# Altium PCB koosh_main_board_v1_2.PcbDoc
Units mil, origin at the board's own origin, x right, y up, seen from the top; angles counter-clockwise.
Board outline 600 x 600 mil, 4 copper layers (Top Layer, PWR, GND, Bottom Layer), stack 23.778 mil thick; 43 components, 48 nets, 176 pads, 73 vias.
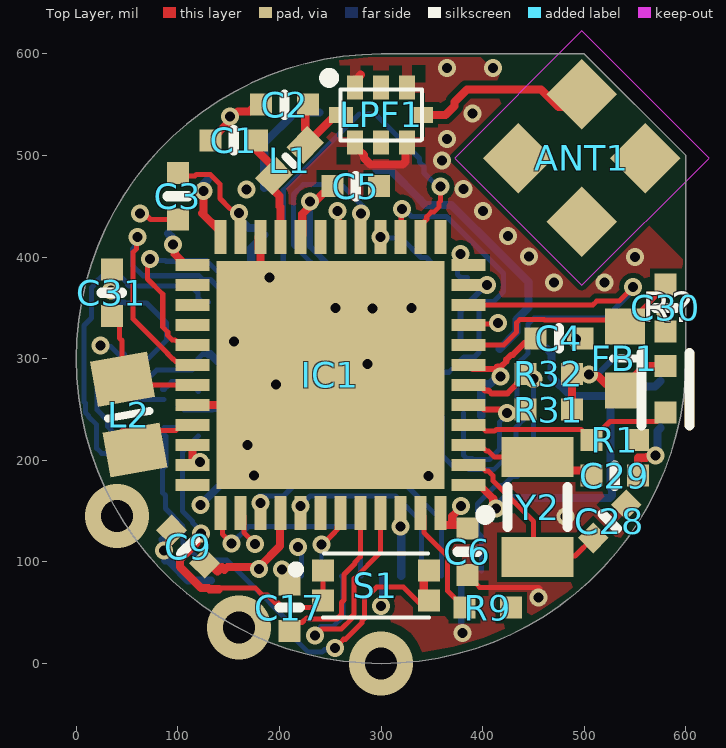
[diagram p0: Top Layer view]
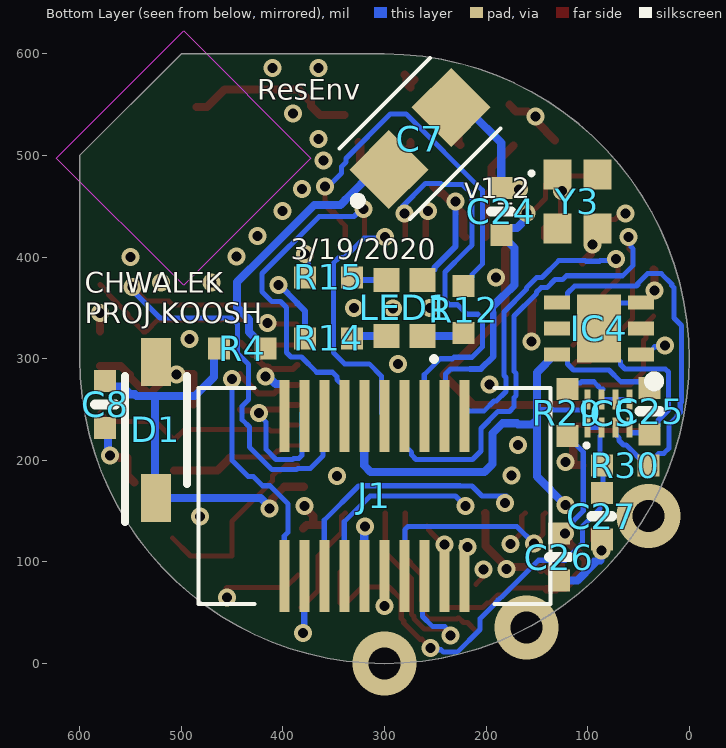
[diagram p1: Bottom Layer view, seen from below]
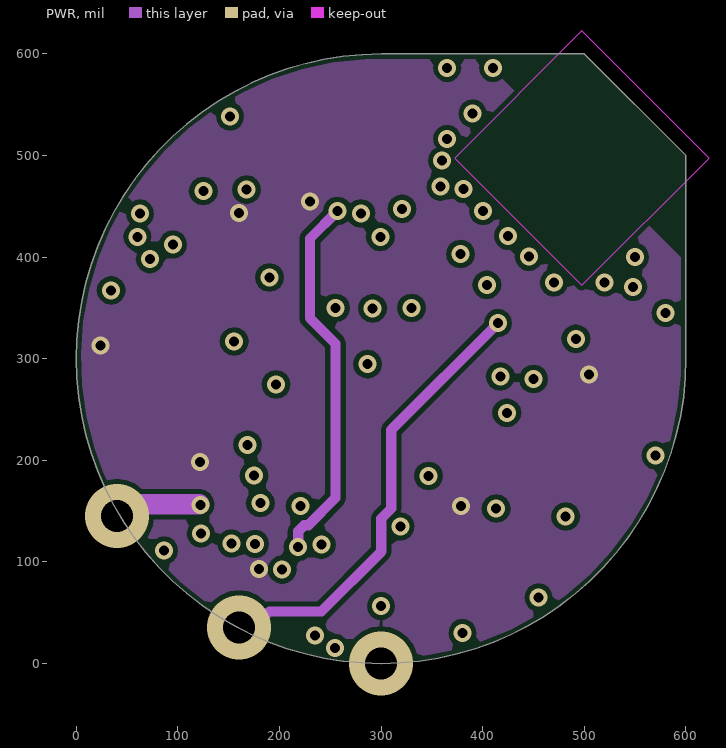
[diagram p2: PWR]
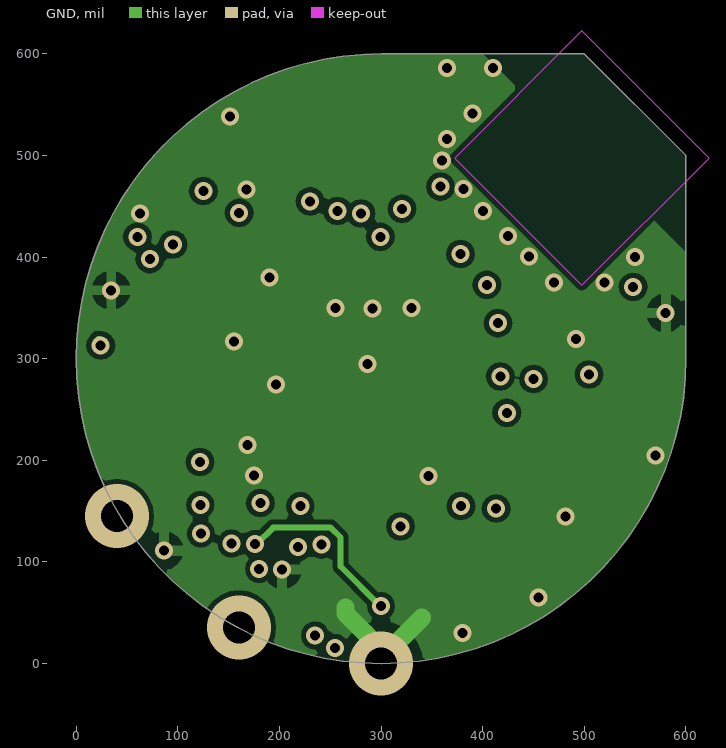
[diagram p3: GND]
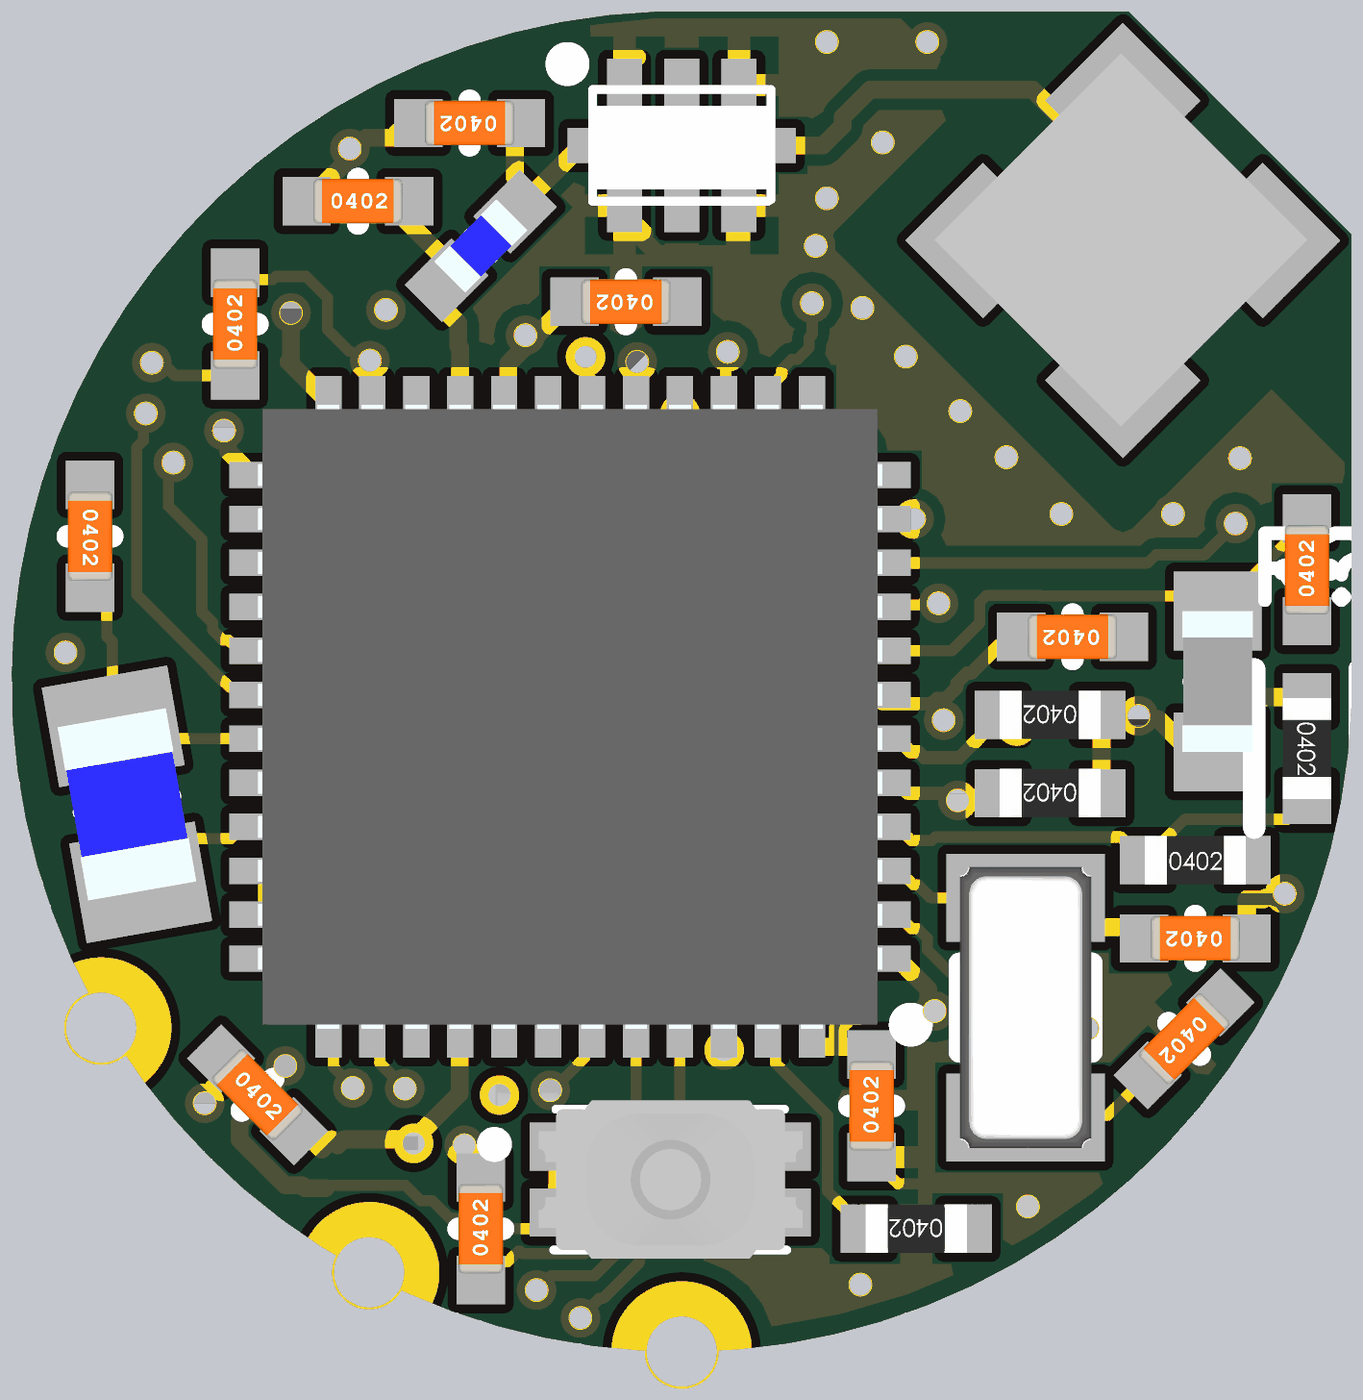
[diagram p4: 3D render of the assembled board from above, using the file's embedded part models]
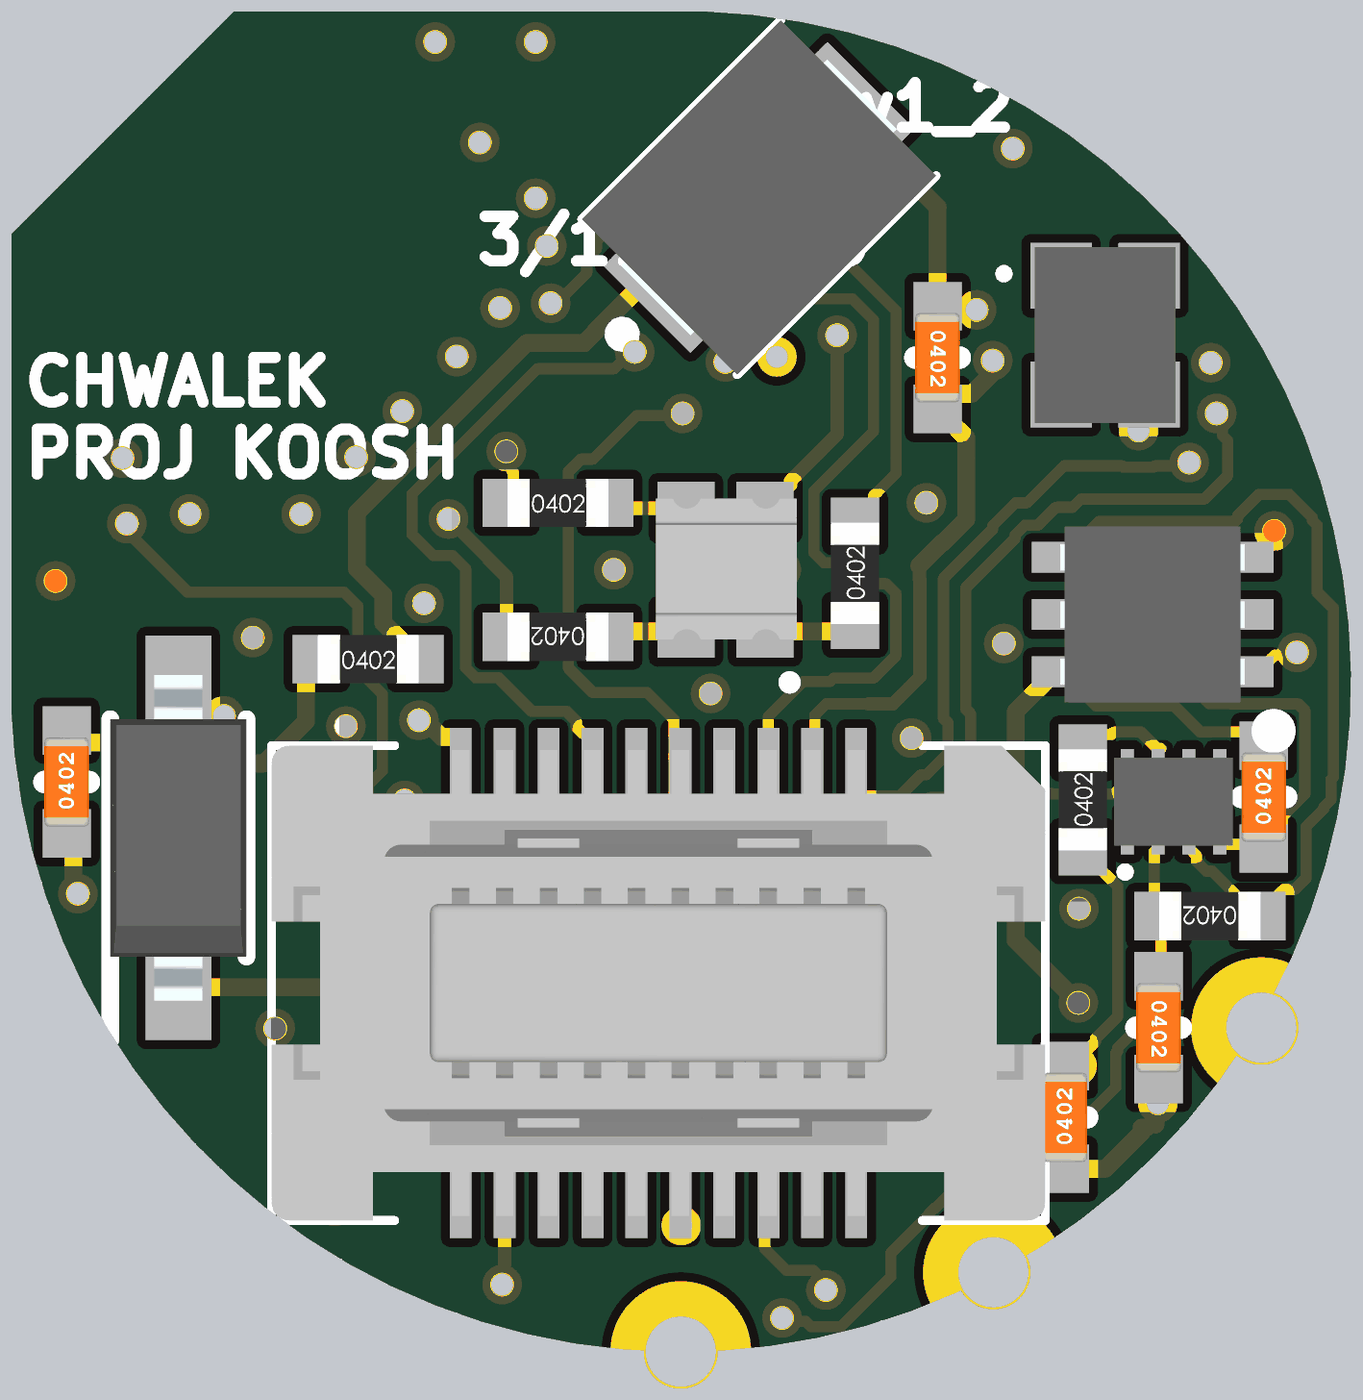
[diagram p5: 3D render of the assembled board from below, using the file's embedded part models]

## Layer stack, top to bottom
Top Solder: solder mask 0.394, Solder Resist, Dk 3.5
Top Layer: signal copper 1.417
Dielectric 2: prepreg 2.795, PP-006, Dk 4.1
PWR: signal copper 1.378
Dielectric 1: dielectric 12.598, FR-4, Dk 4.8
GND: signal copper 1.378
Dielectric 3: prepreg 2.795, PP-006, Dk 4.1
Bottom Layer: signal copper 1.417
Bottom Solder: solder mask 0.394, Solder Resist, Dk 3.5

## Board outline
600,300 cw(c300,300) 300,600 500,600 600,500

## Design rules (kind name [scope] priority, off if disabled: settings)
Clearance [All] p1: gap=5 ignorepadtopadclearanceinfootprint=FALSE except(0: Arc-Hole Track-Hole SMDPad-Hole THPad-Hole Via-Hole Fill-Hole Poly-Hole Region-Hole Text-Hole)
PlaneConnect PWR [InNet('GND') or InNet('3.3V') or InNet('VBAT')] p1: planeconnectstyle=Relief reliefexpansion=20 reliefentries=4 reliefconductorwidth=10 reliefairgap=10
PlaneConnect [All] p2: planeconnectstyle=Relief reliefexpansion=20 reliefentries=4 reliefconductorwidth=10 reliefairgap=10
PolygonConnect [All] p1: connectstyle=Relief reliefconductorwidth=10 reliefentries=4 polygonreliefangle="90 Angle" airgapwidth=10
RoutingVias [All] p1: holewidth=9.84 width=17.72 viastyle="Through Hole" minholewidth=9.84 minwidth=17.72 maxholewidth=9.84 maxwidth=17.72
SolderMaskExpansion [All] p1: expansion=4 istentingtop=FALSE
Width [All] p1: maxlimit=10 minlimit=5 preferedwidth=10 toplayer_maxwidth=8 toplayer_prefwidth=6 midlayer1_minwidth=10 midlayer2_minwidth=10 bottomlayer_maxwidth=8 bottomlayer_prefwidth=6 minimp=50.000000 maximp=50.000000 favimp=50.000000
29 further rules are at their usual default settings.

## Classes and differential pairs
component class koosh_connector: J1
component class koosh_periph: C28 C29 C30 C31 FB1 L2 R31 R32 Y2 Y3
component class koosh_sensors: C17 LED1 R9 R12 R14 R15
component class koosh_power: C24 C25 C26 C27 IC4 IC5 R29 R30 S1
component class koosh_mcu: ANT1 C1 C2 C3 C4 C5 C6 C7 C8 C9 D1 IC1 L1 LPF1 R1 R4 R?

## Components (designator, comment, footprint, x,y, rotation, side; value= is the part's Value field where it differs from the comment)
ANT1 "2065130001" 2065130001 497.55,497.45 r45 top
C1 "0.80pF" SMD-0402C 155,515 r270 top
C2 "0.30pF" SMD-0402C 205,550 r90 top
C3 "0.10µF" SMD-0402C 100,460 r0 top
C4 "0.10µF" SMD-0402C 475,320 r90 top
C5 "0.10µF" SMD-0402C 275,470 r90 top
C6 "100pF" SMD-0402C 385,110 r0 top
C7 "CPH3225A" CPH3225A 265,500 r135 bottom
C8 "0.10µF" SMD-0402C 575,255 r180 bottom
C9 "0.10µF" SMD-0402C 110,115 r225 top
C17 "10000pF" SMD-0402C 210,55 r0 top
C24 "1µF" SMD-0402C 185,445 r0 bottom
C25 "1µF" SMD-0402C 38.9,248.24 r180 bottom
C26 "1µF" SMD-0402C 128,104.83 r180 bottom
C27 "10000pF" SMD-0402C 86,145 r0 bottom
C28 "15pF" SMD-0402C 525,140 r135 top
C29 "15pF" SMD-0402C 530,185 r90 top
C30 "0.10µF" SMD-0402C 580,350 r0 top
C31 "4.7µF" SMD-0402C 35,365 r180 top
D1 "1N5819HW-7-F" SOD3716X145N 525,230 r90 bottom
FB1 "BLM18KG601SZ1D" BEADC1608X95N 540,300 r270 top
IC1 "STM32WB55CGU6" QFN50P700X700X65-49N-D 250,284.17 r180 top
IC4 "NCP718BMT330TBG" SON65P200X200X80-7N 88.66,330 r0 bottom
IC5 "74LVC2G00GS,115" 74AXP2T3407GSX 79.33,246.22 r180 bottom
J1 "0529910208" 0529910208 310,165 r0 bottom
L1 "LQG15HS2N7S02D" INDC1005X55N 210,495 r45 top
L2 "LBR2012T100K" INDC2012X145N 51.55,245 r100 top
LED1 "EAST1616RGBB6" EAST1616RGBB6 280,350 r180 bottom
LPF1 "LFL212G45TC1A007" LFL212G45TC1A007 300,540 r0 top
R1 "100k" SMD-0402-RES 530,220 r270 top
R4 "100" SMD-0402-RES 440,310 r270 bottom
R9 "1k" SMD-0402-RES 405,55 r90 top
R12 "110" SMD-0402-RES 222,348.45 r180 bottom
R14 "30" SMD-0402-RES 355,320 r90 bottom
R15 "24" SMD-0402-RES 355,380 r270 bottom
R29 "100k" SMD-0402-RES 120,247 r180 bottom
R30 "100k" SMD-0402-RES 63,195 r90 bottom
R31 "10k" SMD-0402-RES 465,250 r90 top
R32 "10k" SMD-0402-RES 465,285 r90 top
R? "0" SMD-0402-RES 580,270 r180 top
S1 "EVP-BB4A9B000" EVPBB2A9B000 285,77 r0 top
Y2 "NX3215SA-32.768K-STD-MUA-8" NX3215SA 454,154 r90 top
Y3 "XRCGB32M000F1H01R0" XRCGB32M000F1H01R0 110,455 r270 bottom

## Footprints (in the part's own frame and the unit in brackets; to place one, negate y for a bottom-side part, rotate by r counter-clockwise, add the part's x,y. Pads: shape width x height; smd on the part's side, far side on the other; paste and mask are expansions set on the pad)
74AXP2T3407GSX [mm]
  rect 0.15x0.5 smd: 1(-0.525,-0.35) 2(-0.175,-0.35) 3(0.175,-0.35) 4(0.525,-0.35) 5(0.525,0.35) 6(0.175,0.35) 7(-0.175,0.35) 8(-0.525,0.35)
  silkscreen extent -0.6,-0.85 -0.5,-0.75, body extent -0.67,-0.5 0.67,0.5, height 0.45
0529910208 [mm]
  rect 0.25x1.8 smd: 1(-2.25,-2) 2(-2.25,2) 3(-1.75,-2) 4(-1.75,2) 5(-1.25,-2) 6(-1.25,2) 7(-0.75,-2) 8(-0.75,2) 9(-0.25,-2) 10(-0.25,2) 11(0.25,-2) 12(0.25,2) 13(0.75,-2) 14(0.75,2) 15(1.25,-2) 16(1.25,2) 17(1.75,-2) 18(1.75,2) 19(2.25,-2) 20(2.25,2)
  silkscreen extent -4.4,-2.7 4.4,2.7, body extent -4.4,-2.7 4.4,2.7, height 2.28
2065130001 [mm]
  rect 1.25x1.25 smd: 1(1.125,1.125) 2(1.125,-1.125) 3(-1.125,-1.125) 4(-1.125,1.125)
  Keep-Out Layer region: -2.25,-2.25 2.25,-2.25 2.25,2.25 -2.25,2.25
  body extent -1.51,-1.48 1.49,1.52, height 4
BEADC1608X95N [mm]
  rect 0.9x1 smd: 1(-0.8,0) 2(0.8,0)
  silkscreen extent 0,-0.3 0,0.3, body extent -0.8,-0.4 0.8,0.4, height 0.95
CPH3225A [mm]
  rect 1.4x1.4 smd: 1(-0.8,0.3) 2(1.4,0.3)
  silkscreen extent -2,-0.95 1.9,1.55, body extent -1.36,-0.95 1.96,1.55, height 1.1
EAST1616RGBB6 [mm]
  rect 0.65x0.6 smd: 1(0.45,-0.7) 2(0.45,0.7) 3(-0.45,-0.7) 4(-0.45,0.7)
  silkscreen extent 0.73,-1.28 0.73,-1.28, body extent -0.79,-0.79 0.81,0.81, height 0.46
EVPBB2A9B000 [mm]
  rect 0.55x0.55 smd: 1(-1.075,0.375) 2(-1.075,-0.375) 3(1.575,-0.375) 4(1.575,0.375)
  silkscreen extent -1.85,-0.8 1.58,0.8, body extent -1.25,-0.9 1.75,0.9, height 0.51
INDC1005X55N [mm]
  rect 0.75x0.6 smd: 1(-0.55,0) 2(0.55,0)
  silkscreen extent 0,-0.15 0,0.15, body extent -0.5,-0.25 0.5,0.25, height 0.55
INDC2012X145N [mm]
  rect 1.15x1.45 smd: 1(-0.9,0) 2(0.9,0)
  silkscreen extent 0,-0.53 0,0.53, body extent -1,-0.62 1,0.62, height 1.45
LFL212G45TC1A007 [mm]
  rect 0.4x0.6 smd: 1(-0.65,0.685) 2(0,0.685) 3(0.65,0.685) 5(0.65,-0.685) 6(0,-0.685) 7(-0.65,-0.685)
  rect 0.6x0.4 smd: 4(1,0) 8(-1,0)
  silkscreen extent -1.42,-0.64 1.02,1.05, body extent -1,-0.5 1,0.45, height 0.87
NX3215SA [mm]
  rect 1x1.8 smd: 1(-1.25,0) 2(1.25,0)
  silkscreen extent -0.5,-0.75 0.5,0.75, body extent -1.6,-0.75 1.6,0.75, height 0.8
QFN50P700X700X65-49N-D [mm]
  rect 0.85x0.3 smd: 1(-3.45,2.75) 2(-3.45,2.25) 3(-3.45,1.75) 4(-3.45,1.25) 5(-3.45,0.75) 6(-3.45,0.25) 7(-3.45,-0.25) 8(-3.45,-0.75) 9(-3.45,-1.25) 10(-3.45,-1.75) 11(-3.45,-2.25) 12(-3.45,-2.75) 25(3.45,-2.75) 26(3.45,-2.25) 27(3.45,-1.75) 28(3.45,-1.25) 29(3.45,-0.75) 30(3.45,-0.25) 31(3.45,0.25) 32(3.45,0.75) 33(3.45,1.25) 34(3.45,1.75) 35(3.45,2.25) 36(3.45,2.75)
  rect 0.3x0.85 smd: 13(-2.75,-3.45) 14(-2.25,-3.45) 15(-1.75,-3.45) 16(-1.25,-3.45) 17(-0.75,-3.45) 18(-0.25,-3.45) 19(0.25,-3.45) 20(0.75,-3.45) 21(1.25,-3.45) 22(1.75,-3.45) 23(2.25,-3.45) 24(2.75,-3.45) 37(2.75,3.45) 38(2.25,3.45) 39(1.75,3.45) 40(1.25,3.45) 41(0.75,3.45) 42(0.25,3.45) 43(-0.25,3.45) 44(-0.75,3.45) 45(-1.25,3.45) 46(-1.75,3.45) 47(-2.25,3.45) 48(-2.75,3.45)
  rect 5.7x5.7 smd: 49(0,0)
  silkscreen extent -4,3.38 -3.75,3.62, body extent -3.55,-3.55 3.55,3.55, height 0.65
SMD-0402-RES [mm]
  rect 0.55x0.55 smd: 1(0,0.584) 2(0,-0.584)
  body extent -0.28,-0.57 0.27,0.58, height 0.41
SMD-0402C [mm]
  rect 0.55x0.55 smd: 1(0,0.584) 2(0,-0.584)
  silkscreen extent -0.25,0 0.25,0, body extent -0.25,-0.51 0.25,0.51, height 0.51
SOD3716X145N [mm]
  rect 1.2x0.75 smd: 1(-1.7,0) 2(1.7,0)
  silkscreen extent -2.3,-0.77 1.35,0.77, body extent -1.85,-0.77 1.85,0.77, height 1.45
SON65P200X200X80-7N [mm]
  rect 0.65x0.35 smd: 1(-1.05,0.65) 2(-1.05,0) 3(-1.05,-0.65) 4(1.05,-0.65) 5(1.05,0) 6(1.05,0.65)
  rect 1.1x1.7 smd: 7(0,0)
  silkscreen extent -1.5,1.2 -1.25,1.45, body extent -1.05,-1 1.05,1, height 0.8
XRCGB32M000F1H01R0 [mm]
  rect 0.75x0.7 smd: 1(-0.675,-0.5) 2(0.675,-0.5) 3(0.675,0.5) 4(-0.675,0.5)
  silkscreen extent -0.75,-1.2 -0.65,-1.1, body extent -1,-0.8 1,0.8, height 0.8

## Part data
C1: library part GRM1555C1HR80BA01D, "CAP CER 0.8PF 50V NP0 0402", Digi-Key Part Number=490-6269-1-ND, Manufacturer="Murata Electronics North America", Operating Temperature="-55°C ~ 125°C", Package / Case="0402 (1005 Metric)", Ratings=-, Temperature Coefficient="C0G, NP0", Tolerance=±0.1pF, Voltage=50V, @ qty=0, Applications="General Purpose", Datasheets=http://www.murata.com/~/media/webrenewal/support/library/catalog/products/capacitor/mlcc/c02e.pdf, Factory Stock=0, Features=-, Height - Seated (Max)=-, Image=//media.digikey.com/Renders/Murata%20Renders/ZRB-SERIES-0402.jpg, Lead Spacing=-, Lead Style=-, Minimum Quantity=1, Mounting Type="Surface Mount, MLCC", Packaging="Cut Tape (CT)", Part Number=GRM1555C1HR80BA01D, Part Status=Active, Quantity Available=38847, Series=GRM, Size / Dimension="0.039\" L x 0.020\" W (1.00mm x 0.50mm)", Thickness (Max)="0.022\" (0.55mm)", Unit Price (USD)=0.1
C2: library part GRM1555C1HR30WA01D, "CAP CER 0.3PF 50V NP0 0402", Digi-Key Part Number=490-6261-1-ND, Manufacturer="Murata Electronics North America", Operating Temperature="-55°C ~ 125°C", Package / Case="0402 (1005 Metric)", Ratings=-, Temperature Coefficient="C0G, NP0", Tolerance=±0.05pF, Voltage=50V, @ qty=0, Applications="General Purpose", Datasheets=http://www.murata.com/~/media/webrenewal/support/library/catalog/products/capacitor/mlcc/c02e.pdf, Factory Stock=0, Features=-, Height - Seated (Max)=-, Image=//media.digikey.com/Renders/Murata%20Renders/ZRB-SERIES-0402.jpg, Lead Spacing=-, Lead Style=-, Minimum Quantity=1, Mounting Type="Surface Mount, MLCC", Packaging="Cut Tape (CT)", Part Number=GRM1555C1HR30WA01D, Part Status=Active, Quantity Available=61475, Series=GRM, Size / Dimension="0.039\" L x 0.020\" W (1.00mm x 0.50mm)", Thickness (Max)="0.022\" (0.55mm)", Unit Price (USD)=0.16
C3 C4 C5 C8 C9 C30: library part GCM155R71C104KA55D, "CAP CER 0.1UF 16V X7R 0402", Digi-Key Part Number=490-4759-1-ND, Manufacturer="Murata Electronics North America", Operating Temperature="-55°C ~ 125°C", Package / Case="0402 (1005 Metric)", Ratings=AEC-Q200, Temperature Coefficient=X7R, Tolerance=±10%, Voltage=16V, @ qty=0, Applications=Automotive, Datasheets=http://www.murata.com/~/media/webrenewal/support/library/catalog/products/capacitor/mlcc/c03e.ashx, Factory Stock=0, Features=-, Height - Seated (Max)=-, Image=//media.digikey.com/Renders/Murata%20Renders/ZRB-SERIES-0402.jpg, Lead Spacing=-, Lead Style=-, Minimum Quantity=1, Mounting Type="Surface Mount, MLCC", Packaging="Cut Tape (CT)", Part Number=GCM155R71C104KA55D, Part Status=Active, Quantity Available=734194, Series=GCM, Size / Dimension="0.039\" L x 0.020\" W (1.00mm x 0.50mm)", Thickness (Max)="0.022\" (0.55mm)", Unit Price (USD)=0.1
C6: library part GCM1555C1H101JA16D, "CAP CER 100PF 50V NP0 0402", Digi-Key Part Number=490-10669-1-ND, Manufacturer="Murata Electronics North America", Operating Temperature="-55°C ~ 125°C", Package / Case="0402 (1005 Metric)", Ratings=AEC-Q200, Temperature Coefficient="C0G, NP0", Tolerance=±5%, Voltage=50V, @ qty=0, Applications=Automotive, Datasheets=http://www.murata.com/~/media/webrenewal/support/library/catalog/products/capacitor/mlcc/c03e.ashx, Factory Stock=0, Features=-, Height - Seated (Max)=-, Image=//media.digikey.com/Renders/Murata%20Renders/ZRB-SERIES-0402.jpg, Lead Spacing=-, Lead Style=-, Minimum Quantity=1, Mounting Type="Surface Mount, MLCC", Packaging="Cut Tape (CT)", Part Number=GCM1555C1H101JA16D, Part Status=Active, Quantity Available=61397, Series=GCM, Size / Dimension="0.039\" L x 0.020\" W (1.00mm x 0.50mm)", Thickness (Max)="0.022\" (0.55mm)", Unit Price (USD)=0.1
C7: "Capacitor Polarised", Manufacturer_Name="Seiko Instruments Micro Energy", Mouser Part Number=628-CPH3225A, Datasheet Link=https://www.sii.co.jp/en/me/datasheets/chip-capacitor/cph3225a/, Height=1mm, Manufacturer_Part_Number=CPH3225A, Mouser Price/Stock=https://www.mouser.com/Search/Refine.aspx?Keyword=628-CPH3225A
C17 C27: library part GCM155R71H103KA55D, "CAP CER 10000PF 50V X7R 0402", Digi-Key Part Number=490-4762-1-ND, Manufacturer="Murata Electronics North America", Operating Temperature="-55°C ~ 125°C", Package / Case="0402 (1005 Metric)", Ratings=AEC-Q200, Temperature Coefficient=X7R, Tolerance=±10%, Voltage=50V, @ qty=0, Applications=Automotive, Datasheets=http://www.murata.com/~/media/webrenewal/support/library/catalog/products/capacitor/mlcc/c03e.ashx, Factory Stock=0, Features=-, Height - Seated (Max)=-, Image=//media.digikey.com/Renders/Murata%20Renders/ZRB-SERIES-0402.jpg, Lead Spacing=-, Lead Style=-, Minimum Quantity=1, Mounting Type="Surface Mount, MLCC", Packaging="Cut Tape (CT)", Part Number=GCM155R71H103KA55D, Part Status=Active, Quantity Available=650067, Series=GCM, Size / Dimension="0.039\" L x 0.020\" W (1.00mm x 0.50mm)", Thickness (Max)="0.022\" (0.55mm)", Unit Price (USD)=0.1
C24 C25 C26: library part GCM155C71A105KE38D, "CAP CER 1UF 10V X7S 0402", Digi-Key Part Number=490-13409-1-ND, Manufacturer="Murata Electronics North America", Operating Temperature="-55°C ~ 125°C", Package / Case="0402 (1005 Metric)", Ratings=AEC-Q200, Temperature Coefficient=X7S, Tolerance=±10%, Voltage=10V, @ qty=0, Applications=Automotive, Datasheets=http://www.murata.com/~/media/webrenewal/support/library/catalog/products/capacitor/mlcc/c03e.ashx, Factory Stock=0, Features=-, Height - Seated (Max)=-, Image=//media.digikey.com/Renders/Murata%20Renders/ZRB-SERIES-0402.jpg, Lead Spacing=-, Lead Style=-, Minimum Quantity=1, Mounting Type="Surface Mount, MLCC", Packaging="Cut Tape (CT)", Part Number=GCM155C71A105KE38D, Part Status=Active, Quantity Available=7240, Series=GCM, Size / Dimension="0.039\" L x 0.020\" W (1.00mm x 0.50mm)", Thickness (Max)="0.022\" (0.55mm)", Unit Price (USD)=0.12
C28 C29: library part GCM1555C1H150JA16D, "CAP CER 15PF 50V NP0 0402", Digi-Key Part Number=490-11147-1-ND, Manufacturer="Murata Electronics North America", Operating Temperature="-55°C ~ 125°C", Package / Case="0402 (1005 Metric)", Ratings=AEC-Q200, Temperature Coefficient="C0G, NP0", Tolerance=±5%, Voltage=50V, @ qty=0, Applications=Automotive, Datasheets=http://www.murata.com/~/media/webrenewal/support/library/catalog/products/capacitor/mlcc/c03e.ashx, Factory Stock=0, Features=-, Height - Seated (Max)=-, Image=//media.digikey.com/Renders/Murata%20Renders/ZRB-SERIES-0402.jpg, Lead Spacing=-, Lead Style=-, Minimum Quantity=1, Mounting Type="Surface Mount, MLCC", Packaging="Cut Tape (CT)", Part Number=GCM1555C1H150JA16D, Part Status=Active, Quantity Available=6185, Series=GCM, Size / Dimension="0.039\" L x 0.020\" W (1.00mm x 0.50mm)", Thickness (Max)="0.022\" (0.55mm)", Unit Price (USD)=0.1
C31: library part GRM153R60G475ME15D, "CAP CER 4.7UF 4V X5R 0402", Digi-Key Part Number=490-13231-1-ND, Manufacturer="Murata Electronics North America", Operating Temperature="-55°C ~ 85°C", Package / Case="0402 (1005 Metric)", Ratings=-, Temperature Coefficient=X5R, Tolerance=±20%, Voltage=4V, @ qty=0, Applications="General Purpose", Datasheets=http://psearch.en.murata.com/capacitor/product/GRM153R60G475ME15%23.pdf, Factory Stock=0, Features=-, Height - Seated (Max)=-, Image=//media.digikey.com/Renders/Murata%20Renders/ZRB-SERIES-0402.jpg, Lead Spacing=-, Lead Style=-, Minimum Quantity=1, Mounting Type="Surface Mount, MLCC", Packaging="Cut Tape (CT)", Part Number=GRM153R60G475ME15D, Part Status=Active, Quantity Available=9100, Series=GRM, Size / Dimension="0.039\" L x 0.020\" W (1.00mm x 0.50mm)", Thickness (Max)="0.013\" (0.33mm)", Unit Price (USD)=0.27
D1: "Diode", Manufacturer_Name="Diodes Inc.", Mouser Part Number=621-1N5819HW-F, RS Part Number=7082197P, Allied Price/Stock=http://www.alliedelec.com/diodes-inc-1n5819hw-7-f/70437201/, Allied_Number=70437201, Datasheet Link=http://www.diodes.com/_files/datasheets/ds30217.pdf, Height=1.45mm, Manufacturer_Part_Number=1N5819HW-7-F, Mouser Price/Stock=https://www.mouser.com/Search/Refine.aspx?Keyword=621-1N5819HW-F, RS Price/Stock=http://uk.rs-online.com/web/p/products/7082197P
FB1: "Ferrite Bead", Manufacturer_Name="Murata Electronics", Mouser Part Number=81-BLM18KG601SZ1D, Datasheet Link=http://www.murata.com/~/media/webrenewal/support/library/catalog/products/emc/emifil/c31e.ashx?la=en-gb, Height=0.95mm, Manufacturer_Part_Number=BLM18KG601SZ1D, Mouser Price/Stock=https://www.mouser.com/Search/Refine.aspx?Keyword=81-BLM18KG601SZ1D
IC1: "Integrated Circuit", Manufacturer_Name=STMicroelectronics, Mouser Part Number=511-STM32WB55CGU6, Datasheet Link=https://www.st.com/en/microcontrollers/stm32wb55cg.html, Height=0.65mm, Manufacturer_Part_Number=STM32WB55CGU6, Mouser Price/Stock=https://www.mouser.com/Search/Refine.aspx?Keyword=511-STM32WB55CGU6
IC4: "Integrated Circuit", Manufacturer_Name="ON Semiconductor", Mouser Part Number=863-NCP718BMT330TBG, RS Part Number=1861278, Datasheet Link=https://componentsearchengine.com/Datasheets/1/NCP718BMT330TBG.pdf, Height=0.8mm, Manufacturer_Part_Number=NCP718BMT330TBG, Mouser Price/Stock=https://www.mouser.com/Search/Refine.aspx?Keyword=863-NCP718BMT330TBG, RS Price/Stock=http://uk.rs-online.com/web/p/products/1861278
IC5: "Integrated Circuit", Manufacturer_Name=Nexperia, Datasheet Link=https://assets.nexperia.com/documents/data-sheet/74LVC2G00.pdf, Height=0.35mm, Manufacturer_Part_Number=74LVC2G00GS,115
J1: "Connector", Manufacturer_Name=Molex, Datasheet Link=https://www.molex.com/pdm_docs/sd/529910208_sd.pdf, Height=2.47mm, Manufacturer_Part_Number=0529910208
L1: "Inductor", Manufacturer_Name="Murata Electronics", Datasheet Link=https://www.arrow.com/en/products/lqg15hs2n7s02d/murata-manufacturing, Height=0.55mm, Manufacturer_Part_Number=LQG15HS2N7S02D
L2: "Inductor", Manufacturer_Name="TAIYO YUDEN", Mouser Part Number=963-LBR2012T100K, Datasheet Link=https://componentsearchengine.com/Datasheets/2/LBR2012T100K.pdf, Height=1.45mm, Manufacturer_Part_Number=LBR2012T100K, Mouser Price/Stock=https://www.mouser.com/Search/Refine.aspx?Keyword=963-LBR2012T100K
R1: library part ERJ-2RKF1003X, "RES SMD 100K OHM 1% 1/10W 0402", Digi-Key Part Number=P100KLCT-ND, Manufacturer="Panasonic Electronic Components", Operating Temperature="-55°C ~ 155°C", Package / Case="0402 (1005 Metric)", Power (Watts)="0.1W, 1/10W", Supplier Device Package=0402, Temperature Coefficient=±100ppm/°C, Tolerance=±1%, @ qty=1500, Composition="Thick Film", Datasheets=http://industrial.panasonic.com/www-cgi/jvcr13pz.cgi?E+PZ+3+AOA0002+ERJ2RKF1003X+7+WW, Factory Stock=0, Failure Rate=-, Features="Automotive AEC-Q200", Height - Seated (Max)="0.016\" (0.40mm)", Image=//media.digikey.com/Photos/Panasonic%20Photos/ERJ-PA2-Series.jpg, Minimum Quantity=1, Number of Terminations=2, Packaging="Cut Tape (CT)", Part Number=ERJ-2RKF1003X, Part Status=Active, Quantity Available=2645965, Series=ERJ, Size / Dimension="0.039\" L x 0.020\" W (1.00mm x 0.50mm)", Unit Price (USD)=0.00496
R4: library part ERJ-2RKF1003X, "RES SMD 100 OHM 5% 1/4W 0603", Digi-Key Part Number=P100KLCT-ND, Manufacturer="Panasonic Electronic Components", Operating Temperature="-55°C ~ 155°C", Package / Case="0603 (1608 Metric)", Power (Watts)="0.1W, 1/10W", Supplier Device Package=0603, Temperature Coefficient=±100ppm/°C, Tolerance=±1%, @ qty=1500, Composition="Thick Film", Datasheets=http://industrial.panasonic.com/www-cgi/jvcr13pz.cgi?E+PZ+3+AOA0002+ERJ2RKF1003X+7+WW, Factory Stock=0, Failure Rate=-, Features="Automotive AEC-Q200", Height - Seated (Max)="0.016\" (0.40mm)", Image=//media.digikey.com/Photos/Panasonic%20Photos/ERJ-PA2-Series.jpg, Minimum Quantity=1, Number of Terminations=2, Packaging="Cut Tape (CT)", Part Number=ERJ-2RKF1003X, Part Status=Active, Quantity Available=2645965, Series=ERJ, Size / Dimension="0.039\" L x 0.020\" W (1.00mm x 0.50mm)", Unit Price (USD)=0.00496
R9: library part ERJ-2GEJ102X, "RES SMD 1K OHM 5% 1/10W 0402", Digi-Key Part Number=P1.0KJCT-ND, Manufacturer="Panasonic Electronic Components", Operating Temperature="-55°C ~ 155°C", Package / Case="0402 (1005 Metric)", Power (Watts)="0.1W, 1/10W", Supplier Device Package=0402, Temperature Coefficient=±200ppm/°C, Tolerance=±5%, @ qty=1500, Composition="Thick Film", Datasheets=http://industrial.panasonic.com/www-cgi/jvcr13pz.cgi?E+PZ+3+AOA0001+ERJ2GEJ102X+7+WW, Factory Stock=0, Failure Rate=-, Features="Automotive AEC-Q200", Height - Seated (Max)="0.016\" (0.40mm)", Image=//media.digikey.com/Photos/Panasonic%20Photos/ERJ-PA2-Series.jpg, Minimum Quantity=1, Number of Terminations=2, Packaging="Cut Tape (CT)", Part Number=ERJ-2GEJ102X, Part Status=Active, Quantity Available=1939857, Series=ERJ, Size / Dimension="0.039\" L x 0.020\" W (1.00mm x 0.50mm)", Unit Price (USD)=0.00350
R12 R14 R15: library part ERJ-2GEJ103X, "RES SMD 110 OHM 5% 1/10W 0402", Digi-Key Part Number=P10KJCT-ND, Manufacturer="Panasonic Electronic Components", Operating Temperature="-55°C ~ 155°C", Package / Case="0402 (1005 Metric)", Power (Watts)="0.1W, 1/10W", Supplier Device Package=0402, Temperature Coefficient=±200ppm/°C, Tolerance=±5%, @ qty=1500, Composition="Thick Film", Datasheets=http://industrial.panasonic.com/www-cgi/jvcr13pz.cgi?E+PZ+3+AOA0001+ERJ2GEJ103X+7+WW, Factory Stock=0, Failure Rate=-, Features="Automotive AEC-Q200", Height - Seated (Max)="0.016\" (0.40mm)", Image=//media.digikey.com/Photos/Panasonic%20Photos/ERJ-PA2-Series.jpg, Minimum Quantity=1, Number of Terminations=2, Packaging="Cut Tape (CT)", Part Number=ERJ-2GEJ103X, Part Status=Active, Quantity Available=2560215, Series=ERJ, Size / Dimension="0.039\" L x 0.020\" W (1.00mm x 0.50mm)", Unit Price (USD)=0.00350
R29 R30: library part ERJ-2GEJ104X, "RES SMD 100K OHM 5% 1/10W 0402", Digi-Key Part Number=P100KJCT-ND, Manufacturer="Panasonic Electronic Components", Operating Temperature="-55°C ~ 155°C", Package / Case="0402 (1005 Metric)", Power (Watts)="0.1W, 1/10W", Supplier Device Package=0402, Temperature Coefficient=±200ppm/°C, Tolerance=±5%, @ qty=1500, Composition="Thick Film", Datasheets=http://industrial.panasonic.com/www-cgi/jvcr13pz.cgi?E+PZ+3+AOA0001+ERJ2GEJ104X+7+WW, Factory Stock=0, Failure Rate=-, Features="Automotive AEC-Q200", Height - Seated (Max)="0.016\" (0.40mm)", Image=//media.digikey.com/Photos/Panasonic%20Photos/ERJ-PA2-Series.jpg, Minimum Quantity=1, Number of Terminations=2, Packaging="Cut Tape (CT)", Part Number=ERJ-2GEJ104X, Part Status=Active, Quantity Available=2387986, Series=ERJ, Size / Dimension="0.039\" L x 0.020\" W (1.00mm x 0.50mm)", Unit Price (USD)=0.00350
R31 R32: library part ERJ-2GEJ103X, "RES SMD 10K OHM 5% 1/10W 0402", Digi-Key Part Number=P10KJCT-ND, Manufacturer="Panasonic Electronic Components", Operating Temperature="-55°C ~ 155°C", Package / Case="0402 (1005 Metric)", Power (Watts)="0.1W, 1/10W", Supplier Device Package=0402, Temperature Coefficient=±200ppm/°C, Tolerance=±5%, @ qty=1500, Composition="Thick Film", Datasheets=http://industrial.panasonic.com/www-cgi/jvcr13pz.cgi?E+PZ+3+AOA0001+ERJ2GEJ103X+7+WW, Factory Stock=0, Failure Rate=-, Features="Automotive AEC-Q200", Height - Seated (Max)="0.016\" (0.40mm)", Image=//media.digikey.com/Photos/Panasonic%20Photos/ERJ-PA2-Series.jpg, Minimum Quantity=1, Number of Terminations=2, Packaging="Cut Tape (CT)", Part Number=ERJ-2GEJ103X, Part Status=Active, Quantity Available=2560215, Series=ERJ, Size / Dimension="0.039\" L x 0.020\" W (1.00mm x 0.50mm)", Unit Price (USD)=0.00350
R?: library part ERJ-2RKF1003X, "RES SMD 0 OHM 1% 1/10W 0402", Digi-Key Part Number=P100KLCT-ND, Manufacturer="Panasonic Electronic Components", Operating Temperature="-55°C ~ 155°C", Package / Case="0402 (1005 Metric)", Power (Watts)="0.1W, 1/10W", Supplier Device Package=0402, Temperature Coefficient=±100ppm/°C, Tolerance=±1%, @ qty=1500, Composition="Thick Film", Datasheets=http://industrial.panasonic.com/www-cgi/jvcr13pz.cgi?E+PZ+3+AOA0002+ERJ2RKF1003X+7+WW, Factory Stock=0, Failure Rate=-, Features="Automotive AEC-Q200", Height - Seated (Max)="0.016\" (0.40mm)", Image=//media.digikey.com/Photos/Panasonic%20Photos/ERJ-PA2-Series.jpg, Minimum Quantity=1, Number of Terminations=2, Packaging="Cut Tape (CT)", Part Number=ERJ-2RKF1003X, Part Status=Active, Quantity Available=2645965, Series=ERJ, Size / Dimension="0.039\" L x 0.020\" W (1.00mm x 0.50mm)", Unit Price (USD)=0.00496
S1: "Switch", Manufacturer_Name=Panasonic, Mouser Part Number=667-EVP-BB4A9B000, Datasheet Link=https://industrial.panasonic.com/ac/cdn/e/control/switch/light-touch/catalog/sw_lt_eng_2616s.pdf, Height=0mm, Manufacturer_Part_Number=EVP-BB4A9B000, Mouser Price/Stock=https://www.mouser.com/Search/Refine.aspx?Keyword=667-EVP-BB4A9B000
Y2: "Crystal or Oscillator", Manufacturer_Name=NDK, Mouser Part Number=344-NX3215SA32768K8, Datasheet Link=http://www.ndk.com/images/products/catalog/c_NX3215SA-STD-MUA-14_e.pdf, Manufacturer_Part_Number=NX3215SA-32.768K-STD-MUA-8, Mouser Price/Stock=https://www.mouser.com/Search/Refine.aspx?Keyword=344-NX3215SA32768K8
Y3: "Crystal or Oscillator", Manufacturer_Name="Murata Electronics", Mouser Part Number=81-XRCGB32M000F1H01R, Datasheet Link=https://www.murata.com/en-eu/products/productdetail?partno=XRCGB32M000F1H01R0, Height=0.7mm, Manufacturer_Part_Number=XRCGB32M000F1H01R0, Mouser Price/Stock=https://www.mouser.com/Search/Refine.aspx?Keyword=81-XRCGB32M000F1H01R

## Via types
v1: diameter 17.72, hole 9.84, Top Layer to Bottom Layer, tented both sides, 67 vias
v2: diameter 17.72, hole 9.84, Top Layer to Bottom Layer, 3 vias
v3: diameter 62.99, hole 31.5, Top Layer to Bottom Layer, 3 vias

## Nets (pads, with @x,y where several pads share a name; then routed paths per layer and width w, separated by ;. In a path a pad name is that pad's centre, name@x,y a point inside that pad or via, vN(x,y) a via of type N, cw(c..) or ccw(c..) an arc to the next point about the centre after c; other vN are vias at no path point)
3.3V: C3.1 C5.1 C6.1 C9.1 C24.1 D1.2 FB1.2 IC1.20 IC1.23 IC1.34 IC1.35 IC1.40 IC1.48 IC4.1 J1.3 LED1.2 R31.2 R32.2 R?.2 | length 897.9
  Top Layer w5: C3.1 103,480 116.87,480 118.22,481.36 131.78,481.36 141.36,471.78 141.36,457.67 151.12,447.91 151.19,447.91
  Top Layer w8: IC1.35@105,195 105.59,195.59 IC1.35@123.59,195.59 ; IC1.35@114.17,198.31 IC1.34 ; v1(121.69,198.31) 121.69,197.5 IC1.35@123.59,195.59 ; C9.1@126.26,96.95 132.29,96.95 138.78,90.46 143.32,95 146.01,92.32 148.69,95 v2@178.13,95 ; v2(179.94,93.2) v2@178.13,95 ; IC1.40 200.53,148.09 200.53,115.53 180,95 v2@178.13,95 ; IC1.20 222.38,421.91 222.38,442.38 243.17,463.17 245.17,463.17 C5.1 ; IC1.48@361.8,136.54 361.86,136.49 370,136.49 ; v1(378.5,155) 378.5,153.5 370,145 370,136.49 ; C6.1@380,133 376.51,136.49 370,136.49 ; R31.2@488,255 R32.2 488.21,284.79 504.37,284.79 v1(504.58,284.58) ; v1@505,283.14 513.39,283.14 FB1.2@531.52,265.02 ; FB1.2@535,268.5 536.97,268.5 550.69,282.22 550.69,284.19 559.5,293 R?.2 ; IC1.35@123.59,195.59 123.69,195.49 IC1.35@123.61,195.59
  GND w10: v1@22.24,317.47 v1@24.02,315.7
  Bottom Layer w5: v1@24.02,315.7 27.46,315.7 31.37,311.79 34.04,311.79 41.42,304.41 IC4.1 ; 215.91,290 235,290 240,285 240,244.84 J1.3
  Bottom Layer w6: 193.17,351.83 193.17,345.87 192.86,345.55 192.86,302.14 205,290 215.91,290 ; v1(230,455) 230,410.56 250.83,389.73 250.83,388.03 261.3,377.56 LED1.2 ; v1(504.58,284.58) 513.24,284.58 525,296.34 D1.2
  Bottom Layer w8: v1@120,200 v1(121.69,198.31) ; v1@158.92,440.99 158.92,439.49 169.58,428.83 178.17,428.83 C24.1 172.14,409.14 172.14,372.6 182.6,362.14 182.86,362.14 193.17,351.83
  other v1: 24.02,313 160.32,443.65
BLUE_LED: IC1.12 R15.2 | length 35.7
  Bottom Layer w5: v1(378.12,403.01) 375.69,400.58 375.69,394.41 375,393.72 375,383 R15.2 R15.2@385,380
  Bottom Layer w6: R15.2@378,375 R15.2@380.25,372.75
BOOT0: IC1.4 R1.2 R?.1 | length 213
  Top Layer w5: IC1.4 396.65,234.96 402.93,228.68 411.74,228.68 413.46,230.4 496.6,230.4 R1.2 517,230 525.33,238.33 571.33,238.33 R?.1
GND: C1.2 C2.1 C3.2 C4.2 C6.2 C7.2 C8.2 C9.2 C17.1 C24.2 C25.2 C26.2 C27.1 C28.2 C29.2 C30.2 C31.2 IC1.22 IC1.32 IC1.49 IC4.3 IC4.7 IC5.4 J1.18 LPF1.1 LPF1.3 LPF1.5 LPF1.7 R1.1 | length 1420.1
  Top Layer w5: v1@62.72,447.28 73,437 C3.2 ; v1(202.64,92.38) 202.64,85.36 C17.1 ; C6.2 397,75 455,75 456.09,73.91 455,72.82 v1(455,65)
  Top Layer w8: v1(34.28,367.4) 34.28,387.28 C31.2 ; v1(86.38,111.2) 88.23,113.06 88.23,116.11 93.74,121.61 C9.2 ; IC1.32@105.91,254.65 212.2,254.65 241.73,284.17 181.1,344.8 181.1,407.27 179.2,409.17 IC1.22@179.2,420 ; C1.2 v1@150,533 ; v1(151.34,538.57) 153.97,538.57 158.89,543.49 170.49,543.49 C2.1@177,550 ; IC1.49@153.9,357.3 155,356.19 IC1.49@155,315 ; LPF1.1@270.54,574.78 274.41,570.9 LPF1.1 278.28,570.84 278.28,577.75 280,579.47 ; LPF1.7 274.41,509.1 278.28,505.22 278.44,505.22 283.13,500.53 283.13,497.49 289.4,491.22 320.91,491.22 323.83,494.14 323.83,511.27 LPF1.5 ; C29.2@546.17,178.17 C29.2 553,202.5 560.63,202.5 561.27,203.14 568.14,203.14 v1(570,205) ; C30.2 v1(580,345)
  GND w18: 265,55 265,49.34 284.29,30.05 v3@300,14.34 ; v3(300,0) 300,5 340,45
  Bottom Layer w4: 378.9,38.9 380,37.8 v1(380,30)
  Bottom Layer w5: v1(34.28,367.4) 34.28,364.15 33.57,363.44 41.42,355.59 IC4.3 48.02,354.89 69.01,354.89 88.66,335.23 88.66,318.19 67.62,297.14 67.62,294.41 63.22,290.02 53.96,290.02 23.5,290 20.5,287 20.5,249.5 30.7,239.3 30.7,233.44 C25.2 40.81,227.16 57.71,227.16 58.66,228.11 IC5.4
  Bottom Layer w6: 378.9,38.9 J1.18
  Bottom Layer w8: C27.1@85,122 86.38,120.62 v1(86.38,111.2) ; 87.41,101.64 v1@87.41,110.62 ; 91.61,100.24 93.67,100.24 93.67,98.18 110.02,81.83 C26.2@132.65,81.83 ; v1@172.37,185 v1(175,185) ; C24.2 185,512.15 184.93,512.21 215.05,542.33 C7.2@239.38,542.33 ; v1(570,205) 570,207.63 571.99,209.62 571.99,228.99 C8.2 C8.2@575.08,232.08
  other v1: 481.65,144.65 346.65,184.65 168.47,215.31 196.65,274.65 286.65,294.65 155.35,317 491.65,319.65 255,350 291.65,349.65 330,350 470,375 520,375 190,380 445.39,400.39 550,400 424.74,421.05 62.68,442.72 400.32,445.46 167.53,466.37 380.91,467.22 360,495 365,516.31 390,541.31 365,586.31 410,586.31
GREEN_LED: IC1.11 R14.1 | length 63.7
  Bottom Layer w6: R14.1 378,346.72 385.83,354.55 385.83,354.86 403.72,372.76 v1(404.03,372.76)
I2C1_SCL: IC1.5 J1.17 R31.1 | length 181.8
  Top Layer w6: IC1.5 396.65,254.65 401.3,250 416.31,250 417.36,248.94 421.46,248.94 v1(423.65,246.76) ; v1@423.65,248.99 440.99,248.99 R31.1
  Bottom Layer w5: J1.17@381.05,246.59 381.05,204.93 383.98,202 389.36,202 390.55,200.81 406.61,200.81 416.36,210.56 416.36,237.47 423.65,244.75 v1(423.65,246.76)
I2C1_SDA: IC1.6 J1.20 R32.1 | length 278.9
  Top Layer w6: IC1.6 396.65,274.33 402.43,268.55 405.87,268.55 408.62,265.8 424.27,265.8 442,283.54 R32.1
  Bottom Layer w5: J1.20@398.58,91.26 398.58,125.51 394.86,129.23 394.86,157.21 412.65,175 420,175 429,184 434,184 450,200 450,235.83 450.01,257.67 ; 450,257.68 450,270
  other v1: 450,280
IMU_EN: IC1.46 J1.12 | length 52.5
  PWR w10: v1@317.98,135 v1@319.98,135
  Bottom Layer w8: v1@317.98,135 319.68,135 319.84,134.84 J1.12
  other v1: 319,135
IMU_INT: IC1.17 J1.5 | length 403.4
  Top Layer w5: IC1.17 279.53,443.43 279.88,443.08 v1(280.05,443.08)
  Bottom Layer w5: J1.5 260.79,284.21 245,300 233.09,300 231.59,301.5 213.69,301.5 203.67,311.52 203.67,339.38 208.07,343.78 218.78,343.78 228.12,353.12 235.93,353.12 240.33,357.52 240.33,385.38 220,405.71 213.64,412.07 213.64,461.78 223.22,471.36 243.48,471.36 244.53,472.41 259.71,472.41 v1@282.71,449.41
LH_HP_OUT: IC1.18 J1.2 | length 440.9
  Top Layer w5: v2(256.94,445.31) 258.39,443.87 258.39,421.45 IC1.18 260,420.16 IC1.18@260,435
  PWR w10: v2(218.39,114.85) 218.39,130.28 224.24,136.14 228.21,136.14 255,162.93 255,315 230,340 230,418.37 v2(256.94,445.31)
  Bottom Layer w5: v2(218.39,114.85) 221.42,111.81 J1.2
LH_SIG: IC1.9 | length 473.3
  Top Layer w5: IC1.9 386.63,334.19 414.19,334.19 v1(415,335)
  PWR w10: v3(160,35.5) 174.34,35.5 189.99,51.14 241.14,51.14 300.14,110.14 300.14,142.81 310,152.67 310,230 v1(415,335)
MIC_EN: IC1.45 J1.6 | length 236.5
  Top Layer w5: v1(235,27.55) 241.36,33.91 260.75,33.91 271,44.16 271,46.3 272.51,47.81 273.45,48.78 273.45,83.45 299.21,109.21 IC1.45
  Bottom Layer w5: v1(235,27.55) 235,30.7 240.6,36.3 252.5,36.3 262.45,46.26 262.45,84.59 J1.6
MIC_ENV: IC1.10 J1.15 | length 548.3
  Top Layer w5: IC1.10 508.57,353.07 512.21,356.71 534.08,356.71 v1(548.07,370.7)
  Bottom Layer w5: J1.15 360.35,242.6 360.35,204.65 373,192 385.22,192 386.41,190.81 410.75,190.81 432.91,212.97 432.91,232.88 440.01,239.98 440.01,253.53 433.64,259.9 433.64,294.38 444.67,305.41 444.67,333.93 450.74,340 520.81,340 548.07,367.26 v1(548.07,370.7)
MIC_SIG: IC1.13
NetANT1_1: ANT1.1 LPF1.4 | length 165.5
  Top Layer w8: LPF1.4 363.31,540 372.18,548.87 372.18,552.81 384.37,565 457.22,565 474.58,547.64 ANT1.1@485,547.64
NetC2_2: C2.2 L1.2 LPF1.8 | length 87
  Top Layer w8: C2.2@223,550 225.31,547.69 225.31,525.53 227.4,523.45 L1.2@227.4,512.4 ; L1.2 L1.2@227.4,512.4 ; LPF1.8 256.76,536.13 251.13,536.13 L1.2@227.4,512.4
NetC7_1: C7.1 R4.1 | length 272.8
  Bottom Layer w8: C7.1 308.9,486.08 338.5,456.48 338.5,456.19 343.19,451.5 369.03,451.5 417.34,403.19 445,375.53 445,350.52 433.17,338.7 433.17,326.17 R4.1@416.74,309.74
NetC26_1: C26.1 R29.2 S1.1 S1.2 | length 325.1
  Top Layer w5: 140.4,73.17 141.73,74.49 165.51,74.49 165.65,74.35 165.79,74.49 176.15,74.49 183.08,67.56 188.18,67.56 196.07,59.67 198.77,59.67 203.44,55 S1.2@237.91,55 ; S1.2@242.68,55 242.68,79.76
  Top Layer w8: v1(122.48,127.87) 122.48,125.24 118.17,120.93 118.17,118.68 101.95,102.46 101.95,95.01 122.54,74.42 129.99,74.42 131.25,73.17 140.4,73.17
  Bottom Layer w5: R29.2 104.33,208.33 104.33,150.07 114.33,140.07 114.33,138.67 C26.1@120.88,132.12
NetC27_2: C27.2 IC5.1 IC5.2 R30.1 S1.3 S1.4 | length 502.9
  Top Layer w5: v1@252.35,17.03 252.35,16.55 253.83,15.07 v1(254.65,15.07) ; v1@255.28,15.97 263.22,23.91 264.89,23.91 281,40.02 281,41.9 281.76,42.74 cw(c379.59,-65.64) 283.45,44.24 283.45,63.28 295.6,75.42 321.82,75.42 S1.3@339.51,57.74
  Top Layer w8: S1.3@342.01,60.24 S1.4@342.01,89.76
  Bottom Layer w5: IC5.1 IC5.2 86.22,225.55 88,223.77 88,195 85,192 85,168 87.66,165.34 87.66,152.6 104.33,135.93 104.33,134.53 105.17,133.68 105.17,118.39 121.88,101.69 148.31,101.69 183.05,66.95 cw(c160,35.5) 191.46,58.54 205.9,44.1 205.9,33.51 228.22,11.19 241.78,11.19 244.12,13.54 255.19,13.54 255.19,14.53 v1(254.65,15.07)
NetIC5_5: IC5.5 IC5.6 IC5.7 R29.1 | length 69.5
  Bottom Layer w5: IC5.5 IC5.6 IC5.7 ; 85,270 86.62,270 89.55,272.93 93.94,277.34 106.06,277.34 107.08,276.33 111.67,276.33 R29.1@120,268
NetLED1_1: LED1.1 R12.2 | length 42.4
  Bottom Layer w8: R12.2@223,330 230.56,322.44 LED1.1
NetLED1_3: LED1.3 R14.2 | length 34.3
  Bottom Layer w8: LED1.3 R14.2@332,322.44
NetLED1_4: LED1.4 R15.1 | length 35.3
  Bottom Layer w4: R15.1@329.44,377.56 R15.1@332,375
  Bottom Layer w6: LED1.4 R15.1@329.44,377.56
NetP1_1: R9.2
NRST: C4.1 IC1.7 J1.19 | length 130.5
  Top Layer w6: IC1.7 389.83,290.01 410.14,290.01 412.38,290.38 413.77,291.77 414.44,292.44 417.28,292.44 418.33,292.44 423.17,297.28 423.17,299.14 427.86,303.83 429.72,303.83 C4.1@442,316.11 ; v1@416.38,290.49 417.28,289.59 v1(417.28,282.66)
  Bottom Layer w8: J1.19 398.58,274.25 399.5,275.17 407.17,275.17 414.65,282.66 v1(417.28,282.66)
PWR_EN: IC4.4 IC5.3 R30.2 | length 383.5
  Bottom Layer w5: IC5.3 71.99,231.99 71.99,224.99 69.11,222.11 69.11,219.49 64.72,215.1 62.1,215.1 42,195 30.08,206.92 24.96,206.92 20,211.88 20,235 12,243 12,243.86 8.83,247.03 8.83,256.17 7.66,257.34 7.66,332.66 15,340 15,370 17.21,372.21 17.21,373.46 27.51,383.76 41.06,383.76 50.64,374.18 50.64,372.75 51.73,371.66 112.73,371.66 119.7,364.68 119.7,359.98 124.09,355.59 IC4.4
RCC_OSC32_IN: C28.1 IC1.2 Y2.1 | length 198
  Top Layer w5: IC1.2@385.83,194.49 IC1.2@393.29,194.49 ; IC1.2 396.65,195.59 402.93,189.31 405.67,189.31 410.06,184.92 410.06,179.94 413.47,176.53 450,140 450,105.79 490.79,105.79 C28.1
RCC_OSC32_OUT: C29.1 IC1.3 Y2.2 | length 143.4
  Top Layer w4: IC1.3@377.56,215.28 378.03,214.81 IC1.3@397.95,214.81
  Top Layer w5: IC1.3@397.95,214.81 397.95,213.98 400.06,211.87 400.89,211.87 403.76,209 405.67,209 411.45,203.21 451,203.21 Y2.2
  Top Layer w8: Y2.2@451,203.21 464.21,190 C29.1@507,190
RCC_OSC_IN: IC1.25 Y3.3 | length 34.5
  Top Layer w8: v1(95,412.31) 96.86,410.46 96.86,403.14 IC1.25@105,395
  Bottom Layer w8: Y3.3@90.32,423.43 95,418.74 v1(95,412.31)
RCC_OSC_OUT: IC1.24 Y3.1 | length 70.3
  Top Layer w8: v1(125,465) 125,444.3 123.85,443.16 140.24,426.77 141.73,428.27 IC1.24
  Bottom Layer w8: v1(125,465) 125,469.59 123.85,470.74 Y3.1@129.69,476.57
RED_LED: IC1.14 R12.1 | length 382.3
  Top Layer w5: IC1.14 338.58,430.83 343.43,435.67 343.43,435.88 344.86,437.32 344.86,439.84 349.26,444.23 351.78,444.23 357.12,449.57 357.12,453.97 358.43,455.28 358.43,469.22 v1(358.29,469.36)
  Bottom Layer w5: R12.1 213.67,379.78 213.67,383.05 203.64,393.08 203.64,465.92 278.57,540.84 294.16,540.84 337.8,497.2 337.8,493.48 342.1,489.19 342.1,482.9 355.64,469.36 v1(358.29,469.36)
RF_OUT: C1.1 IC1.21 L1.1 | length 102.8
  Top Layer w8: C1.1@173,510 194.69,488.31 L1.1 193.13,478.13 193.13,467.08 200,460.21 200,450 200.79,449.21 IC1.21
SD_CS: IC1.30 J1.7 | length 599.4
  Top Layer w5: v1(60,420) 59.02,419.02 59.02,407.85 55.96,404.79 55.96,339.04 89.94,305.06 89.94,304.69 94.33,300.29 94.71,300.29 97.58,297.42 110.77,297.42 IC1.30
  Bottom Layer w5: v1(60,420) 57.38,417.38 57.38,410.18 55.14,407.94 55.14,392.06 65.54,381.66 120.89,381.66 124.54,378 132,378 140.02,369.98 145.9,369.98 150.3,365.59 150.3,364.04 172.36,341.98 172.36,287.63 170.29,285.57 170.29,263.73 172.36,261.67 172.36,252.64 176.99,248.01 188.4,248.01 205.01,231.4 205.01,209.19 213.39,200.81 268.82,200.81 273.21,205.2 273.21,207.88 276.14,210.81 278.05,210.81 280.47,213.23 J1.7
SPI1_MISO: IC1.15 J1.13 | length 349.3
  Top Layer w5: IC1.15 319.77,420.87 319.77,446.69 v1(320.64,447.57)
  Bottom Layer w5: v1(320.64,447.57) 322.36,447.57 329.93,440 364.27,440 420.39,383.88 420.39,365.98 410.81,356.4 402.21,356.4 396.33,350.51 396.33,306.07 391.93,301.67 381.67,301.67 366.67,286.67 351.18,286.67 346.79,282.28 346.79,279.6 343.86,276.67 341.95,276.67 339.53,274.25 J1.13
SPI1_MOSI: IC1.16 J1.9 | length 249.8
  Bottom Layer w5: v1@296.03,418.97 319.85,418.97 339.26,399.56 344.7,399.56 350.33,393.93 350.33,306.07 339.26,295 315,295 303.08,283.08 303.08,246.66 J1.9
  other v1: 299.2,420
SPI1_SCK: IC1.43 J1.4 | length 84.6
  Top Layer w5: v1@240,115 240.06,115 253.56,128.51 253.56,128.56 256.44,131.44 256.44,134.11 IC1.43@257.89,135.57
  Bottom Layer w4: J1.4@240,115 240,119.04 240.14,118.9 241.1,118.9 241.1,91.26 J1.4@241.1,115
  other v1: 241.1,117
SUPERCAP: C8.1 D1.1 IC1.1 R4.2 | length 417.4
  Top Layer w8: IC1.1@379.47,174 398.56,174 410.35,162.21 410.35,155.41 v1(413.27,152.49)
  Bottom Layer w8: v1(413.27,152.49) 413.27,154.59 421.76,163.07 D1.1 527.34,165.41 527.34,171.44 525.77,173.02 525.77,261.74 527.34,263.31 ; R4.2 467.86,305.14 467.86,282.14 486.69,263.31 527.34,263.31 ; C8.1 569.69,272.69 557.69,272.69 550,265 545.6,265 543.91,263.31 527.34,263.31
SYS_SWCLK: IC1.41 J1.14 | length 187.5
  Bottom Layer w5: v1@220,155 230,165 314.06,165 339.53,139.53 J1.14
  other v1: 220.4,155
SYS_SWDIO: IC1.39 J1.16 | length 259
  PWR w10: v1@180.3,158.9 v1@181.1,158.9
  Bottom Layer w5: v1@180,165 180,159.21 v1@180.3,158.9 ; v1@180.3,165 203.99,165 213.85,174.86 225.72,174.86 225.86,175 318.2,175 318.34,174.86 325.51,174.86 359.21,141.16 J1.16
  other v1: 181.1,158
TP_INT: IC1.29 J1.1 | length 373.3
  Top Layer w5: v1(72.32,398.02) 70.07,395.77 70.07,378.56 85.07,363.56 85.07,331.14 90.01,326.2 90.01,322.94 94.41,318.54 97.01,318.54 98.45,317.11 110.77,317.11 IC1.29
  Bottom Layer w5: v1(72.32,398.02) 73.82,396.52 87.66,396.52 88.22,395.96 101.78,395.96 102.34,396.52 128.48,396.52 145.02,379.98 150.04,379.98 160.3,369.73 160.3,368.19 182.36,346.12 182.36,283.49 180.29,281.43 180.29,267.87 189.87,258.29 192.26,258.29 201.81,248.74 J1.1@221.42,248.74
TSC_G2_IO1: C17.2 IC1.44 | length 166.4
  Top Layer w5: C17.2 218.33,40.33 222.19,40.33 226.87,45 227.65,45 228.74,43.91 256.61,43.91 261,48.3 261,60 263.45,62.44 263.45,87.59 274.29,98.43 274.29,99.76 279.53,105 IC1.44
TSC_G2_IO4: IC1.47 R9.1 | length 111.3
  Top Layer w5: IC1.47 341.99,144.94 341.99,129.04 365.33,105.7 365.33,71.67 R9.1
USB_DN: IC1.37 J1.8 | length 216.2
  Top Layer w5: IC1.37 143.96,146.11 143.96,127.33 152.69,118.61 v1(152.69,118.05)
  Bottom Layer w5: v1(152.69,118.05) 169.64,135 276.72,135 279.65,132.07 279.65,87.08 J1.8
USB_DP: IC1.38 J1.10 | length 245.8
  Top Layer w5: IC1.38 164.82,144.94 164.82,129.04 175.51,118.36 175.51,118.22 v1(175.97,117.76)
  GND w6: v1(175.97,117.76) 177.76,117.76 193.86,133.86 250.28,133.86 260,124.14 260,95.56 299.06,56.5 v1(299.81,56.5)
  Bottom Layer w5: v1(299.81,56.5) 300.16,56.85 J1.10
VBAT: C25.1 IC4.6 IC5.8 J1.11 | length 675.8
  PWR w10: v3(40,145) 54.34,145 v3@66.01,156.67
  PWR w20: v3@66.01,156.67 v1@120.86,156.67
  Bottom Layer w5: C25.1 45,277.34 67.34,277.34 79.04,289.04 113.89,289.04 119.7,294.85 119.7,300.02 124.09,304.41 IC4.6 ; IC5.8@100,253.11 100.45,252.66 103.08,252.66 106.07,249.67 133.93,249.67 134.26,250 150,250
  Bottom Layer w8: v1(121.97,156.14) 150,184.13 150,240 ; IC4.6 132.11,304.41 150,286.52 150,250 150,240 ; J1.11 319.84,194.84 313.66,188.66 201.34,188.66 193.51,196.49 193.51,226.63 183.63,236.51 169.67,236.51 168.47,235.31 154.69,235.31 150,240
VDDA/VREF: C30.1 FB1.1 IC1.8 | length 243.2
  Top Layer w5: IC1.8@377.56,313.7 420.85,313.7 433.44,326.29 433.44,335.53 436.37,338.46 460.8,338.46 460.93,338.33 523.17,338.33 FB1.1@534.19,327.3 ; FB1.1@535,326.5 536.97,326.5 552.19,341.71 552.19,343.68 571.67,363.17 571.67,364.67 C30.1
VFBSMPS: C31.1 IC1.31 L2.2 | length 133.4
  Top Layer w5: C31.1 42.59,334.41 42.59,320.26 45,317.85 45,287.21 57.88,274.33 IC1.31
VLXSMPS: IC1.33 L2.1 | length 71.4
  Top Layer w5: L2.1@45,229.57 97.95,229.57 103.35,234.96 IC1.33
pads on no net: ANT1.2 ANT1.3 ANT1.4 C5.2 IC1.19 IC1.26 IC1.27 IC1.28 IC1.36 IC1.42 IC4.2 IC4.5 LPF1.2 LPF1.6 Y3.2 Y3.4

## Polygon pours and split planes (outlines as drawn)
GND on GND "Top Layer-GND" (solid, remove dead copper, pour order 2): 300,600 ccw(c300,300) 600,300 600,405 400,600
GND on Top Layer "Top Layer-GND 1" (solid, remove dead copper, pour order 1): 596.94,303.07 cw(c303.16,303.06) 303.16,596.84 398.16,596.84 596.94,398.06
3.3V on PWR "Top Layer-GND 1" (solid, remove dead copper, pour order 3): 595,300 cw(c300,300) 300,595 400,595 595,400

## Silkscreen, mask and mechanical layers (free items; w line width, h text height)
Bottom Overlay:
  text "ResEnv" at 425,555 h20
  text "v1_2" at 221.82,458.03 h20
  text "3/19/2020" at 392.44,398.14 h20
  text "CHWALEK / PROJ KOOSH" at 595,335 h20
Mechanical Board Shape:
  the board outline again, w3.94